# EAGLE board Frisk_PCB (EAGLE 9.7.0)
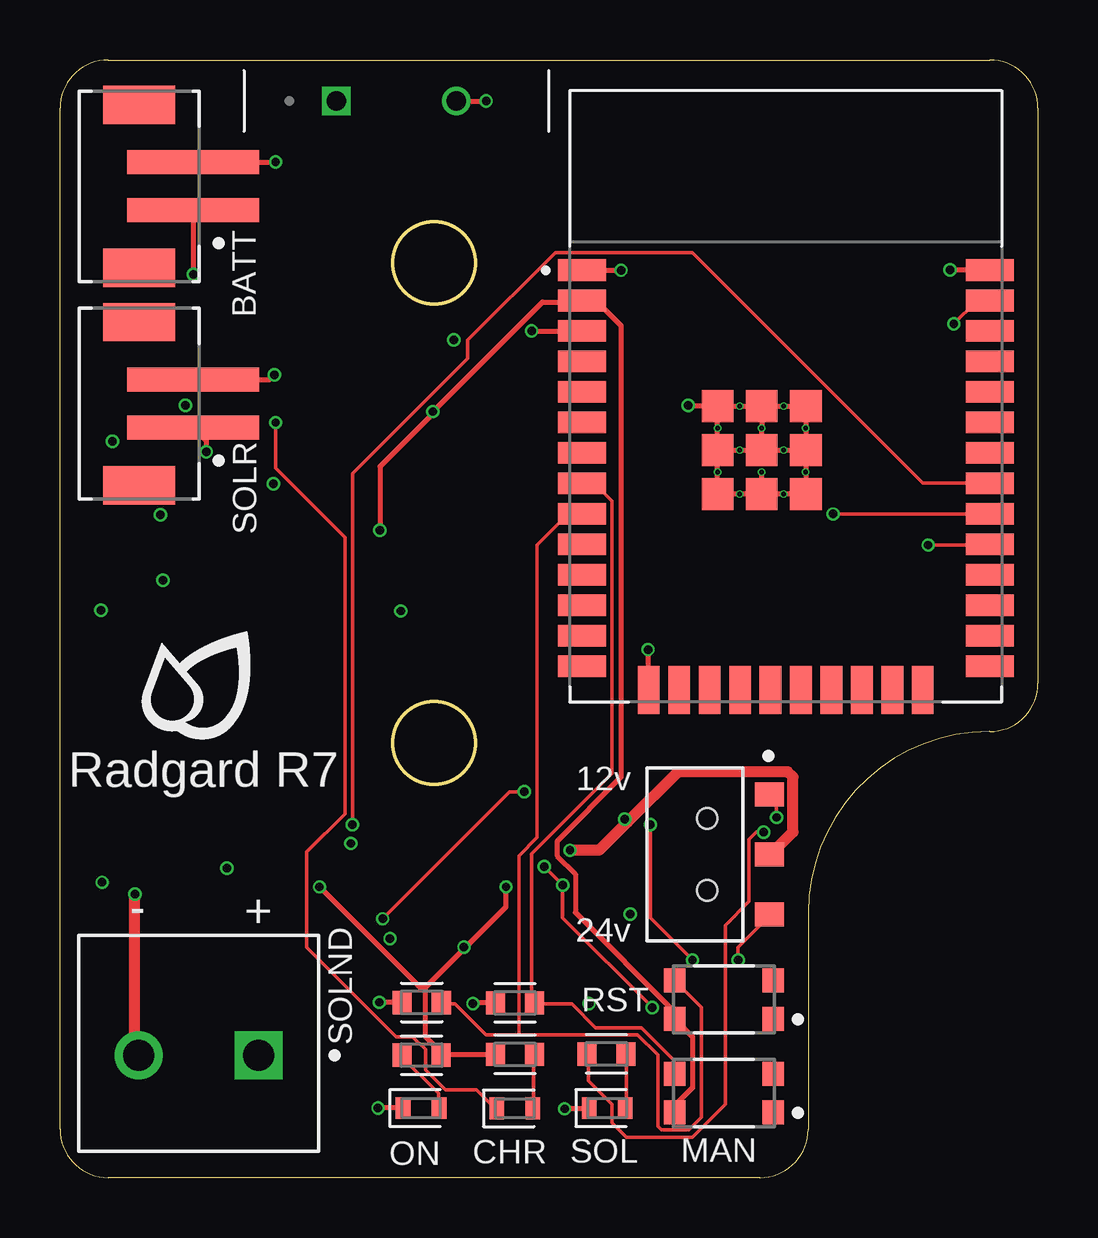
[diagram p0: board, top side]
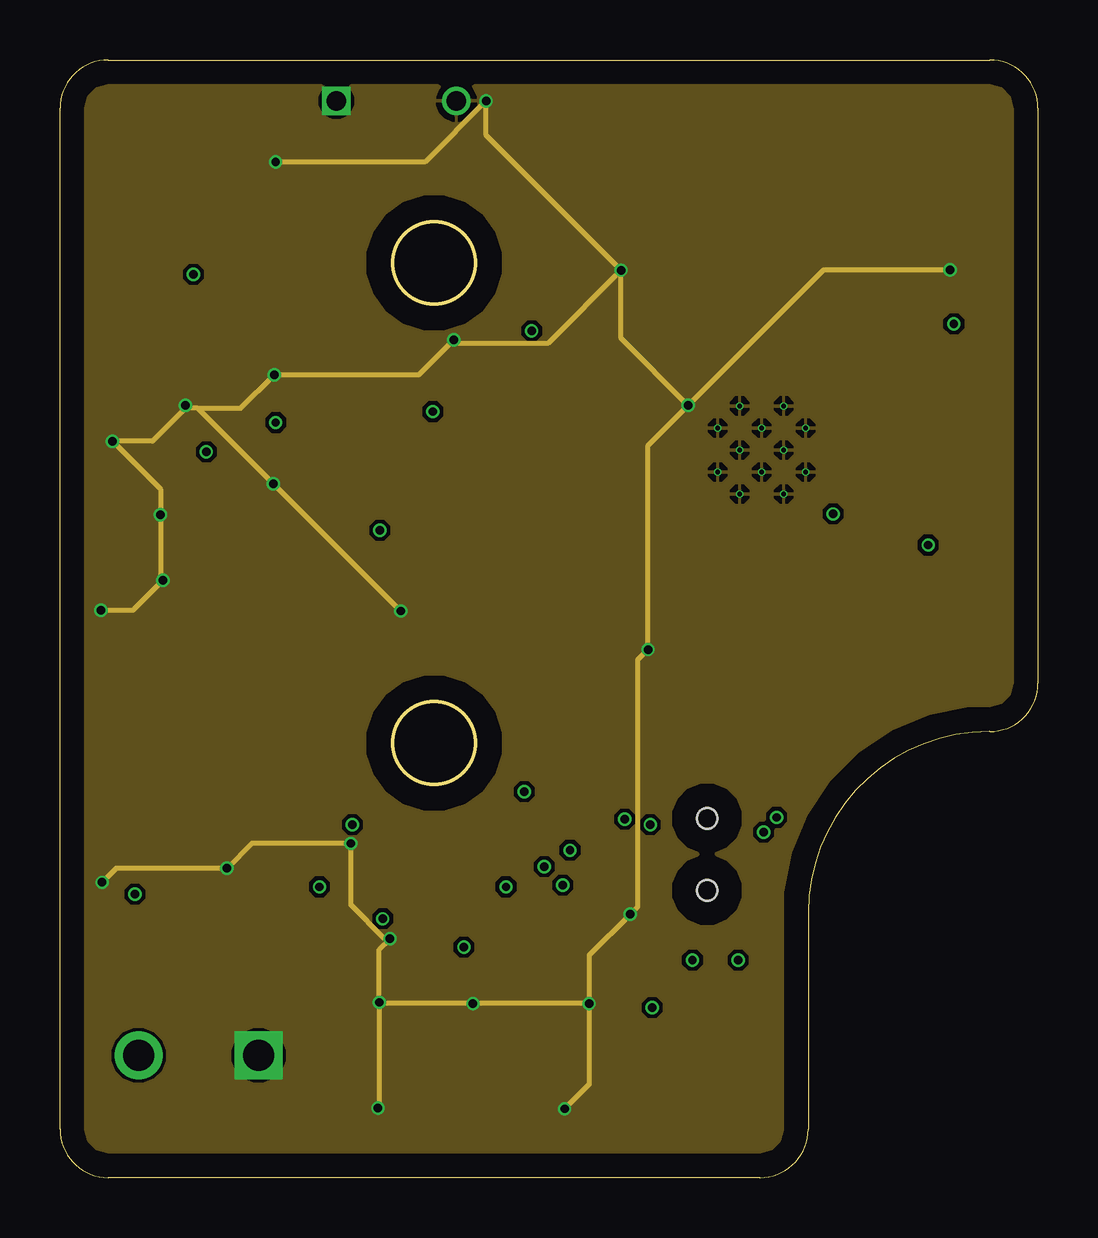
[diagram p1: board, inner layer Route2]
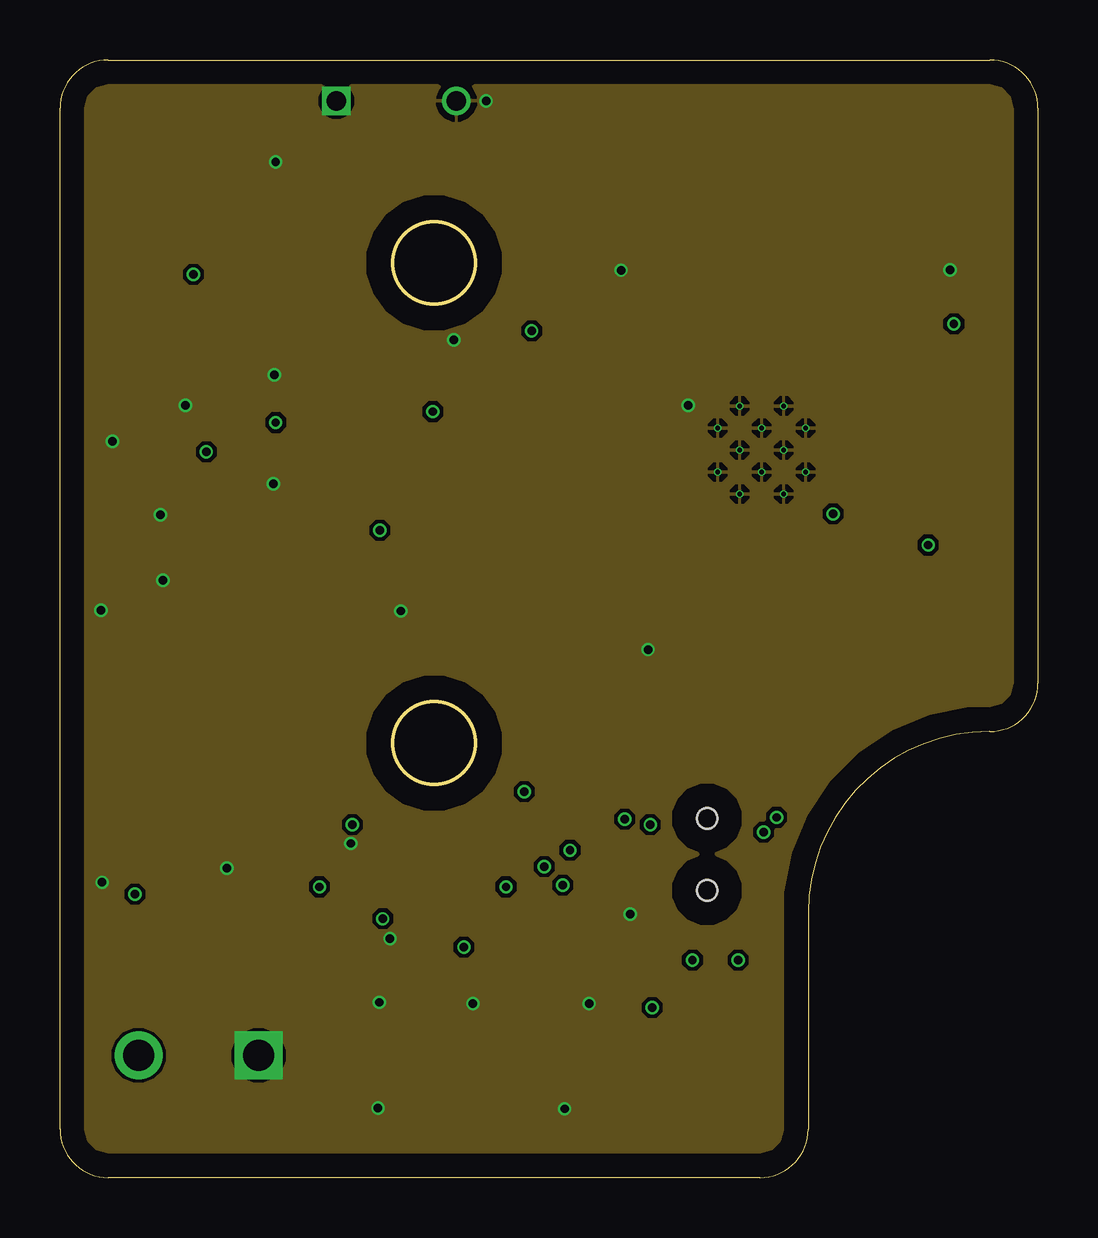
[diagram p2: board, inner layer Route15]
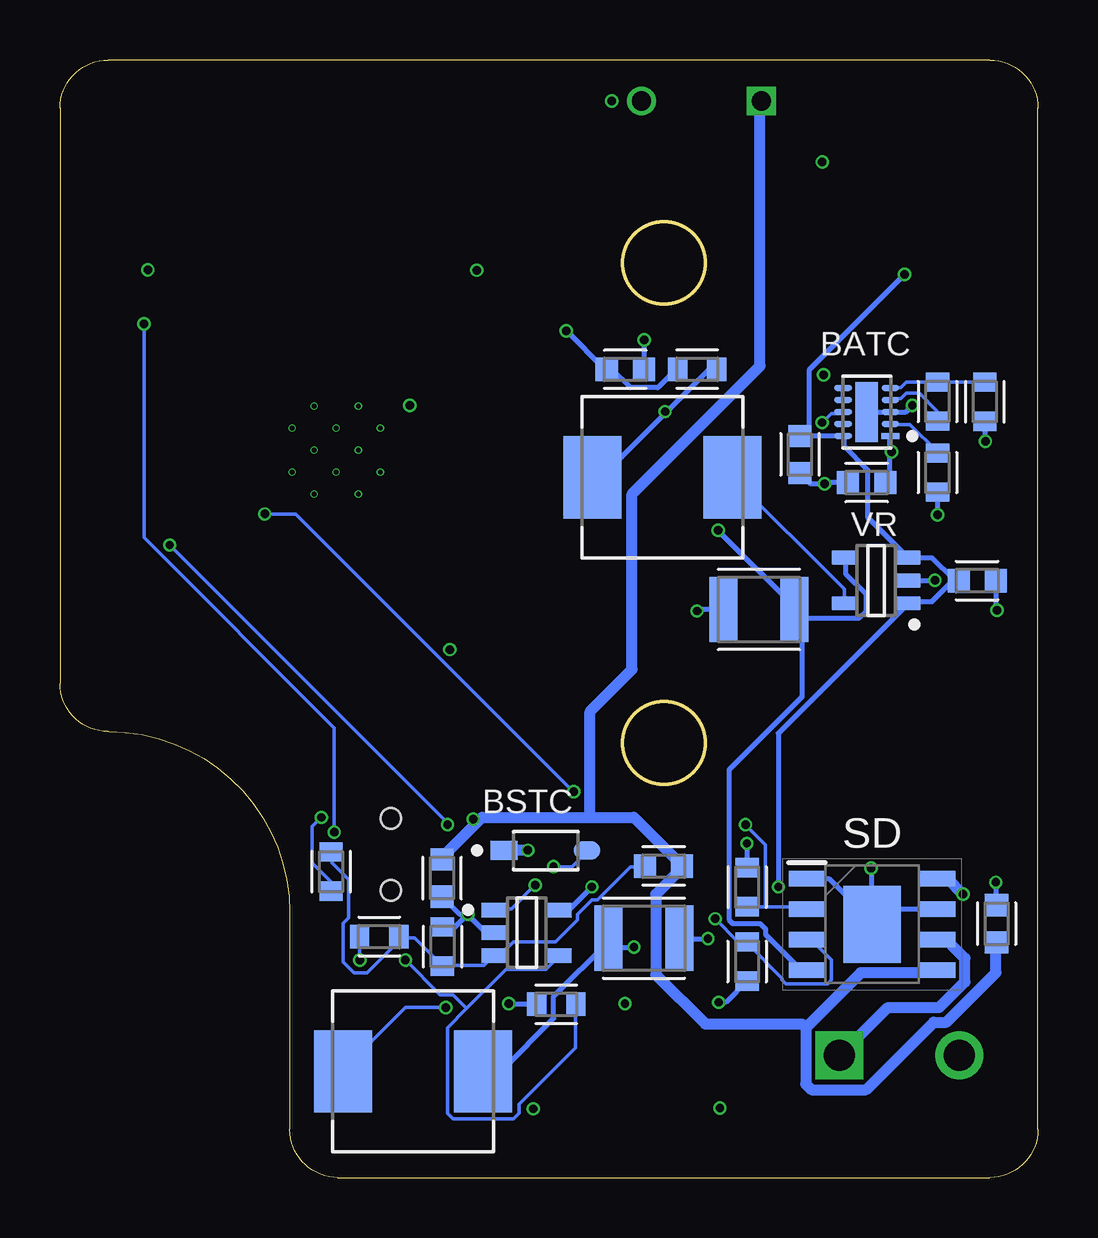
[diagram p3: board, bottom side, seen from below]

Size 40.77 x 46.58 mm. Coordinates in mm from the lower left corner, seen from the top.
Outline: 2.01,46.58 arc90 0,44.58 0,2.01 arc90 2.01,0 29.18,0 arc90 31.19,2.01 31.19,11.05 arc-90 38.73,18.59 38.76,18.59 arc90 40.77,20.6 40.77,44.58 arc90 38.76,46.58 2.01,46.58
Outline: circle at 15.6,38.13 radius 1.71
Outline: circle at 15.6,18.11 radius 1.71
Copper layers (1+2*15+16): Top 0.035mm / dielectric 1.5mm / Route2 0.035mm / dielectric 0.15mm / Route15 0.035mm / dielectric 0.2mm / Bottom 0.035mm
Design rules "default *": minimum track width 6mil, minimum drill 0.35mm, track to track 6mil, track to pad 6mil, pad to pad 6mil, via to via 6mil, smd to smd 6mil, copper to edge 40mil, drill to drill 6mil, minimum pad ring 0mil, minimum via ring 4mil, stop-mask expansion 4mil, vias tented up to drill 0mil, thermal gap 10mil
Net classes: 0 default: width 0.127 mm; 1 GND: width 0.203 mm; 2 V_LOW: width 0.203 mm; 5 V_HIGH: width 0.457 mm
tKeepout: 7 lines
tRestrict: 8 lines

## Footprints (pad centres in the part's own frame; a part is rotated, then mirrored left to right if it is on the bottom)
C&K_AYZ0102AGRLC_0 = smd 1 x 1.2: 1 -2.5,2.6; 2 0,2.6; 3 2.5,2.6 | hole 0.85: -1.5,0; 1.5,0
TEXAS_INSTRUMENTS_BQ24210DQCT_2 = smd 0.736 x 0.242: 1 -0.988,1; 2 -0.988,0.5; 3 -0.988,0; 4 -0.988,-0.5; 5 -0.988,-1; 6 0.988,-1; 7 0.988,-0.5; 8 0.988,0; 9 0.988,0.5; 10 0.988,1 | smd 0.94 x 2.5: 11 0,0
JST_B2B-PH-SM4-TB_LF_SN_0 = smd 1 x 5.5: 1 1,1; 2 -1,1 | smd 1.6 x 3: 3 3.4,-1.25; 4 -3.4,-1.25
TEXAS_INSTRUMENTS_LMR62421XMF-NOPB_0 = smd 1.05 x 0.6: 1 -1.35,0.95; 2 -1.35,0; 3 -1.35,-0.95; 4 1.35,-0.95; 5 1.35,0.95
CAPC1608X85 = smd 0.921 x 0.97: 1 -0.775,0; 2 0.775,0
CAPC3225X135 = smd 1.165 x 2.715: 1 -1.475,0; 2 1.475,0
CAPPRD500W60D1250H2700 = drill 0.8 pad 1.15: N 2.5,0 | drill 0.8 pad 1.15 square: P -2.5,0
LEDC1608X65N_RND-R = smd 0.612 x 0.912: A 0.75,0; C -0.75,0
ON_SEMI_MBR0530_2 = smd 1.108 x 0.782: 1 -1.73,0; 2 1.73,0
VISHAY_IHLP2525CZER100M01_0 = smd 2.413 x 3.429: 1 -2.921,0; 2 2.921,0
C&K_COMPONENTS_KMR231NG_LFS_0 = smd 0.9 x 1: 1 -2.05,0.8; 2 2.05,0.8; 3 -2.05,-0.8; 4 2.05,-0.8
MODULE_ESP32-WROOM-32E_(16MB) = smd 2 x 0.9: 1 -8.5,5.26; 2 -8.5,3.99; 3 -8.5,2.72; 4 -8.5,1.45; 5 -8.5,0.18; 6 -8.5,-1.09; 7 -8.5,-2.36; 8 -8.5,-3.63; 9 -8.5,-4.9; 10 -8.5,-6.17; 11 -8.5,-7.44; 12 -8.5,-8.71; 13 -8.5,-9.98; 14 -8.5,-11.25; 25 8.5,-11.25; 26 8.5,-9.98; 27 8.5,-8.71; 28 8.5,-7.44; 29 8.5,-6.17; 30 8.5,-4.9; 31 8.5,-3.63; 32 8.5,-2.36; 33 8.5,-1.09; 34 8.5,0.18; 35 8.5,1.45; 36 8.5,2.72; 37 8.5,3.99; 38 8.5,5.26 | smd 0.9 x 2: 15 -5.715,-12.25; 16 -4.445,-12.25; 17 -3.175,-12.25; 18 -1.905,-12.25; 19 -0.635,-12.25; 20 0.635,-12.25; 21 1.905,-12.25; 22 3.175,-12.25; 23 4.445,-12.25; 24 5.715,-12.25 | smd 1.33 x 1.33: 39_1 -2.835,-0.405; 39_2 -1,-0.405; 39_3 0.835,-0.405; 39_4 -2.835,-2.24; 39_5 -1,-2.24; 39_6 0.835,-2.24; 39_7 -2.835,-4.075; 39_8 -1,-4.075; 39_9 0.835,-4.075 | drill 0.2 pad 0.3: 39_10 -1.917,-0.405; 39_11 -0.083,-0.405; 39_12 -2.835,-1.323; 39_13 -1,-1.323; 39_14 0.835,-1.323; 39_15 -1.917,-2.24; 39_16 -0.083,-2.24; 39_17 -2.835,-3.158; 39_18 -1,-3.158; 39_19 0.835,-3.158; 39_20 -1.917,-4.075; 39_21 -0.083,-4.075
RESC1608X60 = smd 0.799 x 0.974: 1 -0.815,0; 2 0.815,0
SOIC127P600X170-9N = smd 1.525 x 0.65: 1 -2.712,1.905; 2 -2.712,0.635; 3 -2.712,-0.635; 4 -2.712,-1.905; 5 2.712,-1.905; 6 2.712,-0.635; 7 2.712,0.635; 8 2.712,1.905 | smd 2.39 x 3.2: 9 0,0
PHOENIX_CONTACT_1935161_0 = drill 1.3 pad 2 square: 1 -2.5,0.5 | drill 1.3 pad 2: 2 2.5,0.5
TEXAS_INSTRUMENTS_TPS62203DBVT_0 = smd 0.6 x 1.1: 1 -0.95,-1.3; 2 0,-1.3; 3 0.95,-1.3; 4 0.95,1.3; 5 -0.95,1.3

## Placement (x,y rotation side)
12V/24V_SWITCH  C&K_AYZ0102AGRLCC&K_AYZ0102AGRLC_0_0  [C&K_AYZ0102AGRLC_0]  26.98,13.47 270 top
BATC  TEXAS_INSTRUMENTS_BQ24210DQCTTEXAS_INSTRUMENTS_BQ24210DQCT_0_2  [TEXAS_INSTRUMENTS_BQ24210DQCT_2]  7.14,31.91 180 bottom
BATT  JST_B2B-PH-SM4-TB_LF_SNJST_B2B-PH-SM4-TB_LF_SN_0_0  [JST_B2B-PH-SM4-TB_LF_SN_0]  4.54,41.32 270 top
BSTC  TEXAS_INSTRUMENTS_LMR62421XMF-NOPBTEXAS_INSTRUMENTS_LMR62421XMF-NOPB_0_0  [TEXAS_INSTRUMENTS_LMR62421XMF-NOPB_0]  21.31,10.2 0 bottom
C1  4.7uF  [CAPC1608X85]  2.53,24.88 180 bottom
C2  22uF  [CAPC3225X135]  11.63,23.68 0 bottom
C3  22uF  [CAPC3225X135]  16.43,9.98 180 bottom
C4  4.7uF  [CAPC1608X85]  24.84,12.48 270 bottom
C5  470pF  [CAPC1608X85]  15.61,12.98 0 bottom
C6  4.7uF  [CAPC1608X85]  1.73,10.58 90 bottom
C7  4.7uF  [CAPC1608X85]  7.14,28.97 0 bottom
C8  4.7uF  [CAPC1608X85]  9.93,30.14 90 bottom
C9  1uF  [CAPC1608X85]  17.2,33.69 0 bottom
C13  UVZ1E222  [CAPPRD500W60D1250H2700]  14.02,44.87 0 top
CHR  LED_RED  [LEDC1608X65N_RND-R]  18.96,2.89 0 top
D2  ON_SEMI_MBR0530ON_SEMI_MBR0530_0_2  [ON_SEMI_MBR0530_2]  20.52,13.63 0 bottom
L1  VISHAY_IHLP2525CZER100M01VISHAY_IHLP2525CZER100M01_0_0  [VISHAY_IHLP2525CZER100M01_0]  26.05,4.43 180 bottom
L3  VISHAY_IHLP2525CZER100M01VISHAY_IHLP2525CZER100M01_0_0  [VISHAY_IHLP2525CZER100M01_0]  15.65,29.19 180 bottom
MAN  C&K_COMPONENTS_KMR231NG_LFSC&K_COMPONENTS_KMR231NG_LFS_0_0  [C&K_COMPONENTS_KMR231NG_LFS_0]  27.68,3.52 180 top
MCU  ESP32-WROOM-32E_(16MB)  [MODULE_ESP32-WROOM-32E_(16MB)]  30.25,32.56 0 top
ON  LED_GREEN  [LEDC1608X65N_RND-R]  15.05,2.9 0 top
R1  180k  [RESC1608X60]  27.46,10.04 180 bottom
R2  10k  [RESC1608X60]  24.82,9.63 90 bottom
R3  86.6k  [RESC1608X60]  29.46,12.75 270 bottom
R4  10k  [RESC1608X60]  14.2,33.69 0 bottom
R5  10k  [RESC1608X60]  20.08,7.22 180 bottom
R6  10k  [RESC1608X60]  12.12,12.11 90 bottom
R7  1.5k  [RESC1608X60]  15.07,5.1 180 top
R8  10k  [RESC1608X60]  15.08,7.3 180 top
R9  10k  [RESC1608X60]  18.97,7.28 180 top
R10  21.5k  [RESC1608X60]  4.19,32.34 90 bottom
R11  787  [RESC1608X60]  4.19,29.39 90 bottom
R12  10k  [RESC1608X60]  12.12,9.01 90 bottom
R15  1.5k  [RESC1608X60]  18.96,5.14 180 top
R17  1.5k  [RESC1608X60]  22.78,5.15 0 top
R_THERM  10k NTC THERM  [RESC1608X60]  2.21,32.34 270 bottom
RST  C&K_COMPONENTS_KMR231NG_LFSC&K_COMPONENTS_KMR231NG_LFS_0_0  [C&K_COMPONENTS_KMR231NG_LFS_0]  27.68,7.43 180 top
SD  TB67H451FNG  [SOIC127P600X170-9N]  6.91,10.55 0 bottom
SOL  LED_BLUE  [LEDC1608X65N_RND-R]  22.81,2.9 0 top
SOLND  PHOENIX_CONTACT_1935161PHOENIX_CONTACT_1935161_0_0  [PHOENIX_CONTACT_1935161_0]  5.78,5.59 180 top
SOLR  JST_B2B-PH-SM4-TB_LF_SNJST_B2B-PH-SM4-TB_LF_SN_0_0  [JST_B2B-PH-SM4-TB_LF_SN_0]  4.55,32.25 270 top
VR  TEXAS_INSTRUMENTS_TPS62203DBVTTEXAS_INSTRUMENTS_TPS62203DBVT_0_0  [TEXAS_INSTRUMENTS_TPS62203DBVT_0]  6.74,24.89 90 bottom

## Library data of the parts
12V/24V_SWITCH = C&K - AYZ0102AGRLC; AUTOMOTIVE: No; CENTROID_NOT_SPECIFIED: No; CONTACT_CURRENT_RATING: 100mA; CONTACT_RESISTANCE: 80mΩ; DATASHEET: https://www.ckswitches.com/media/1431/ayz.pdf; DEVICE_CLASS_L1: Electromechanical; DEVICE_CLASS_L2: Switches; DEVICE_CLASS_L3: Slide Switches; DIGIKEY_DESCRIPTION: SWITCH SLIDE SPDT 100MA 12V; DIGIKEY_PART_NUMBER: 401-2012-1-ND; ELECTROMECHANICAL_LIFE: 10000Cycles; FOOTPRINT_VARIANT_NAME_0: Recommended_Land_Pattern; HEIGHT: 1.5mm; LEAD_FREE: Yes; MF: C&K; MFG_PACKAGE_IDENT: 0; MFG_PACKAGE_IDENT_DATE: 0; MFG_PACKAGE_IDENT_REV: 0; MOUNT: Surface Mount; MOUSER_DESCRIPTION: Slide Switches SPDT SMT 1.2A SUBMIN; MOUSER_PART_NUMBER: 611-AYZ0102AGRLC; MPN: AYZ0102AGRLC; PACKAGE: SMT_7MM2_5MM3; PREFIX: SW; ROHS: Yes; TEMPERATURE_RANGE_HIGH: +60°C; TEMPERATURE_RANGE_LOW: -10°C; THROW_CONFIGURATION: SPDT; VERIFICATION_VERSION: 0.0.0.3; VOLTAGE_RATING_DC: 12V
BATC = Texas Instruments - BQ24210DQCT; AUTOMOTIVE: No; CENTROID_NOT_SPECIFIED: No; DATASHEET: https://www.ti.com/lit/ds/symlink/bq24210.pdf?ts=1599751812951&ref_url=https%253A%252F%252Fwww.ti.com%252Fstore%252Fti%252Fen%252Fp%252Fproduct%252F%253Fp%253DBQ24210DQCT%2526keyMatch%253DBQ24210DQCT%2526tisearch%253DSearch-EN-everything%2526usecase%253DOPN; DEVICE_CLASS_L1: Integrated Circuits (ICs); DEVICE_CLASS_L2: Power Management ICs; DEVICE_CLASS_L3: Battery Management; DIGIKEY_DESCRIPTION: IC BATT CHARGER LI-ION 10WSON; DIGIKEY_PART_NUMBER: 296-28738-1-ND; FOOTPRINT_PARAMETERS_1: {"fp_type":"DFN","params":{"N":{"nom":10,"long name":"Number of leads","min":null,"max":null,"short name":"N","type":"count"},"A":{"nom":750000,"long name":"Height","min":700000,"max":800000,"short name":"A","type":"measurement"},"A1":{"nom":25000,"long name":"Package clearance","min":0,"max":50000,"short name":"A1","type":"measurement"},"A2":{"nom":725000,"long name":"Package height","min":650000,"max":800000,"short name":"A2","type":"measurement"},"D":{"nom":3000000,"long name":"Package length","min":2900000,"max":3100000,"short name":"D","type":"measurement"},"E":{"nom":2000000,"long name":"Package width","min":1900000,"max":2100000,"short name":"E","type":"measurement"},"B":{"nom":250000,"long name":"Lead width","min":200000,"max":300000,"short name":"B","type":"measurement"},"C":{"nom":200000,"long name":"Lead thickness","min":null,"max":null,"short name":"C","type":"measurement"},"L":{"nom":300000,"long name":"Lead foot length","min":250000,"max":350000,"short name":"L","type":"measurement"},"e":{"nom":500000,"long name":"Lead pitch","min":null,"max":null,"short name":"e","type":"measurement"},"HT":{"default":"Yes","long name":"Thermal pad","type":"multichoiceparent","short name":"HT","children":["D2","E2","PC"]},"offset x":{"nom":0,"long name":"X Center offset","min":null,"max":null,"short name":"offset x","type":"measurement"},"offset y":{"nom":0,"long name":"Y Center offset","min":null,"max":null,"short name":"offset y","type":"measurement"},"LS":{"default":"Rounded rectangle","long name":"Land shape","type":"multichoice","short name":"LS"},"LS1":{"default":"Rectangle","long name":"Land shape (Pin 1)","type":"multichoice","short name":"LS1"},"solder toe":{"nom":400000,"long name":"Solder fillet (toe)","min":null,"max":null,"short name":"solder toe","type":"fixedmeasurement"},"solder heel":{"nom":0,"long name":"Solder fillet (heel)","min":null,"max":null,"short name":"solder heel","type":"fixedmeasurement"},"solder side":{"nom":-40000,"long name":"Solder fillet (side)","min":null,"max":null,"short name":"solder side","type":"fixedmeasurement"},"courtyard":{"nom":500000,"long name":"Courtyard","min":null,"max":null,"short name":"courtyard","type":"fixedmeasurement"},"SF":{"default":"A","long name":"Packing level","type":"multichoiceparent","short name":"SF","help":"http://support.upverter.com/customer/portal/articles/978783-what-is-a-footprint-packing-level","children":["solder toe","solder heel","solder side","courtyard"]},"D2":{"nom":2400000,"long name":"Thermal pad length","min":2300000,"max":2500000,"short name":"D2","type":"measurement"},"E2":{"nom":840000,"long name":"Thermal pad width","min":740000,"max":940000,"short name":"E2","type":"measurement"},"PC":{"long name":"Paste coverage (%)","type":"percentage","short name":"PC","value":40}}}; FOOTPRINT_PARAMETERS_2: {"fp_type":"DFN","params":{"N":{"nom":10,"long name":"Number of leads","min":null,"max":null,"short name":"N","type":"count"},"A":{"nom":750000,"long name":"Height","min":700000,"max":800000,"short name":"A","type":"measurement"},"A1":{"nom":25000,"long name":"Package clearance","min":0,"max":50000,"short name":"A1","type":"measurement"},"A2":{"nom":725000,"long name":"Package height","min":650000,"max":800000,"short name":"A2","type":"measurement"},"D":{"nom":3000000,"long name":"Package length","min":2900000,"max":3100000,"short name":"D","type":"measurement"},"E":{"nom":2000000,"long name":"Package width","min":1900000,"max":2100000,"short name":"E","type":"measurement"},"B":{"nom":250000,"long name":"Lead width","min":200000,"max":300000,"short name":"B","type":"measurement"},"C":{"nom":200000,"long name":"Lead thickness","min":null,"max":null,"short name":"C","type":"measurement"},"L":{"nom":300000,"long name":"Lead foot length","min":250000,"max":350000,"short name":"L","type":"measurement"},"e":{"nom":500000,"long name":"Lead pitch","min":null,"max":null,"short name":"e","type":"measurement"},"D2":{"nom":2400000,"long name":"Thermal pad length","min":2300000,"max":2500000,"short name":"D2","type":"measurement"},"E2":{"nom":840000,"long name":"Thermal pad width","min":740000,"max":940000,"short name":"E2","type":"measurement"},"PC":{"long name":"Paste coverage (%)","type":"percentage","short name":"PC","value":40},"HT":{"default":"Yes","long name":"Thermal pad","type":"multichoiceparent","short name":"HT","children":["D2","E2","PC"]},"offset x":{"nom":0,"long name":"X Center offset","min":null,"max":null,"short name":"offset x","type":"measurement"},"offset y":{"nom":0,"long name":"Y Center offset","min":null,"max":null,"short name":"offset y","type":"measurement"},"LS":{"default":"Rounded rectangle","long name":"Land shape","type":"multichoice","short name":"LS"},"LS1":{"default":"Rectangle","long name":"Land shape (Pin 1)","type":"multichoice","short name":"LS1"},"solder toe":{"nom":300000,"long name":"Solder fillet (toe)","min":null,"max":null,"short name":"solder toe","type":"fixedmeasurement"},"solder heel":{"nom":0,"long name":"Solder fillet (heel)","min":null,"max":null,"short name":"solder heel","type":"fixedmeasurement"},"solder side":{"nom":-40000,"long name":"Solder fillet (side)","min":null,"max":null,"short name":"solder side","type":"fixedmeasurement"},"courtyard":{"nom":250000,"long name":"Courtyard","min":null,"max":null,"short name":"courtyard","type":"fixedmeasurement"},"SF":{"default":"B","long name":"Packing level","type":"multichoiceparent","short name":"SF","help":"http://support.upverter.com/customer/portal/articles/978783-what-is-a-footprint-packing-level","children":["solder toe","solder heel","solder side","courtyard"]}}}; FOOTPRINT_PARAMETERS_3: {"fp_type":"DFN","params":{"N":{"nom":10,"long name":"Number of leads","min":null,"max":null,"short name":"N","type":"count"},"A":{"nom":750000,"long name":"Height","min":700000,"max":800000,"short name":"A","type":"measurement"},"A1":{"nom":25000,"long name":"Package clearance","min":0,"max":50000,"short name":"A1","type":"measurement"},"A2":{"nom":725000,"long name":"Package height","min":650000,"max":800000,"short name":"A2","type":"measurement"},"D":{"nom":3000000,"long name":"Package length","min":2900000,"max":3100000,"short name":"D","type":"measurement"},"E":{"nom":2000000,"long name":"Package width","min":1900000,"max":2100000,"short name":"E","type":"measurement"},"B":{"nom":250000,"long name":"Lead width","min":200000,"max":300000,"short name":"B","type":"measurement"},"C":{"nom":200000,"long name":"Lead thickness","min":null,"max":null,"short name":"C","type":"measurement"},"L":{"nom":300000,"long name":"Lead foot length","min":250000,"max":350000,"short name":"L","type":"measurement"},"e":{"nom":500000,"long name":"Lead pitch","min":null,"max":null,"short name":"e","type":"measurement"},"D2":{"nom":2400000,"long name":"Thermal pad length","min":2300000,"max":2500000,"short name":"D2","type":"measurement"},"E2":{"nom":840000,"long name":"Thermal pad width","min":740000,"max":940000,"short name":"E2","type":"measurement"},"PC":{"long name":"Paste coverage (%)","type":"percentage","short name":"PC","value":40},"HT":{"default":"Yes","long name":"Thermal pad","type":"multichoiceparent","short name":"HT","children":["D2","E2","PC"]},"offset x":{"nom":0,"long name":"X Center offset","min":null,"max":null,"short name":"offset x","type":"measurement"},"offset y":{"nom":0,"long name":"Y Center offset","min":null,"max":null,"short name":"offset y","type":"measurement"},"LS":{"default":"Rounded rectangle","long name":"Land shape","type":"multichoice","short name":"LS"},"LS1":{"default":"Rectangle","long name":"Land shape (Pin 1)","type":"multichoice","short name":"LS1"},"solder toe":{"nom":200000,"long name":"Solder fillet (toe)","min":null,"max":null,"short name":"solder toe","type":"fixedmeasurement"},"solder heel":{"nom":0,"long name":"Solder fillet (heel)","min":null,"max":null,"short name":"solder heel","type":"fixedmeasurement"},"solder side":{"nom":-40000,"long name":"Solder fillet (side)","min":null,"max":null,"short name":"solder side","type":"fixedmeasurement"},"courtyard":{"nom":100000,"long name":"Courtyard","min":null,"max":null,"short name":"courtyard","type":"fixedmeasurement"},"SF":{"default":"C","long name":"Packing level","type":"multichoiceparent","short name":"SF","help":"http://support.upverter.com/customer/portal/articles/978783-what-is-a-footprint-packing-level","children":["solder toe","solder heel","solder side","courtyard"]}}}; FOOTPRINT_VARIANT_NAME_0: Recommended_Land_Pattern; FOOTPRINT_VARIANT_NAME_1: IPC_A; FOOTPRINT_VARIANT_NAME_2: IPC_B; FOOTPRINT_VARIANT_NAME_3: IPC_C; HEIGHT: 0.8mm; IMPORTED_FROM: vault; IMPORT_TS: 1521175915; LEAD_FREE: Yes; MAX_JUNCTION_TEMP: +125°C; MAX_SUPPLY_VOLTAGE: 18V; MF: Texas Instruments; MFG_PACKAGE_IDENT: DQC0010A; MFG_PACKAGE_IDENT_COMPONENT_ID: 5c282db217c73b58; MFG_PACKAGE_IDENT_DATE: 0; MFG_PACKAGE_IDENT_REV: 0; MIN_SUPPLY_VOLTAGE: 3.5V; MOUSER_DESCRIPTION: 800mA, single-input, single cell Li-ion Solar battery charger 10-WSON -40 to 85; MOUSER_PART_NUMBER: 595-BQ24210DQCT; MPN: BQ24210DQCT; NOMINAL_SUPPLY_CURRENT: 0.8mA; NUMBER_OF_CELLS: 1; OUTPUT_CURRENT: 800mA; PACKAGE: WSON10; PREFIX: U; ROHS: Yes; STANDOFF_HEIGHT: 0mm; TEMPERATURE_RANGE_HIGH: +85°C; TEMPERATURE_RANGE_LOW: -40°C; VAULT_GUID: 3C1E92C9-7C0E-4F0B-8E5B-B3C5C5314291; VERIFICATION_VERSION: 0.0.0.3
BATT SOLR = JST - B2B-PH-SM4-TB(LF)(SN); CENTROID_NOT_SPECIFIED: No; COLOR: White; CONTACT_MATERIAL: Brass; CONTACT_PLATING: Tin; CURRENT_RATING: 2 A; DATASHEET: https://upverter.com/datasheet/05f4473ffc638d76a3bb68900fd4324175be47ba.pdf; DIGIKEY_DESCRIPTION: CONN 2 Positions Header, Shrouded Connector 0.079" (2.00mm) Surface Mount Tin; DIGIKEY_PART_NUMBER: 455-1734-1-ND; FLAMMABILITY_RATING: UL 94 V-0; GENDER: Female; HOUSING_COLOR: Natural; HOUSING_MATERIAL: Nylon; IMPORTED_FROM: octopart; INSULATION_RESISTANCE: 1 GΩ; LEAD_FREE: yes; MF: JST; MOUNTING_TYPE: surface mount; MPN: B2B-PH-SM4-TB(LF)(SN); NUMBER_OF_CONTACTS: 2; NUMBER_OF_POSITIONS: 2; NUMBER_OF_ROWS: 1; NUM_PINS: 2; PACKAGE: CONN_SMT_7MM95_5MM0; PIN_PITCH: 2 mm; PREFIX: J; ROHS: yes; SIZE_HEIGHT: 6.6 mm; SIZE_LENGTH: 7.95 mm; SIZE_WIDTH: 5 mm; TEMPERATURE_RANGE_HIGH: +85˚C; TEMPERATURE_RANGE_LOW: -25˚C; VOLTAGE_RATING_AC: 100 V
BSTC = LMR62421; CENTROID_NOT_SPECIFIED: No; DATASHEET: http://www.ti.com/lit/ds/symlink/lmr62421.pdf; DIGIKEY_DESCRIPTION: IC REG BST SEPIC ADJ 2.1A SOT23; DIGIKEY_PART_NUMBER: 296-39047-1-ND; LEAD_FREE: yes; MF: Texas Instruments; MFG_PACKAGE_IDENT: DBV(R-PDSO-G5); MOUSER_PART_NUMBER: 926-LMR62421XMF/NOPB; MPN: LMR62421XMF/NOPB; PACKAGE: SOT-23-5; PREFIX: U; ROHS: yes; TEMPERATURE_RANGE_HIGH: +125°C; TEMPERATURE_RANGE_LOW: -40°C
C1-C9 = Capacitor; CATEGORY: Capacitor
C13 = CAPPRD500W60D1250H2700
CHR ON SOL = LED; CATEGORY: LED; COLOR: RED; DESCRIPTION: CHIP LED ROUND; SUB-CATEGORY: CHIP; TYPE: ROUND_TOP
D2 = MBR0530; AUTOMOTIVE: No; CENTROID_NOT_SPECIFIED: No; DATASHEET: http://www.onsemi.com/pub/Collateral/MBR0530T1-D.PDF; DC_BLOCKING_VOLTAGE: 30V; DEVICE_CLASS_L1: Discrete Semiconductors; DEVICE_CLASS_L2: Diodes; DEVICE_CLASS_L3: Schottky Diodes; DIGIKEY_DESCRIPTION: DIODE SCHOTTKY 30V 500MA SOD123; DIGIKEY_PART_NUMBER: MBR0530CT-ND; FOOTPRINT_PARAMETERS_1: {"fp_type":"SOD123","params":{"N":{"long name":"Number of leads","type":"fixed","short name":"N","value":2},"A":{"nom":1170000,"long name":"Height","min":940000,"max":1350000,"short name":"A","type":"measurement"},"A1":{"nom":50000,"long name":"Package clearance","min":0,"max":100000,"short name":"A1","type":"measurement"},"A2":{"nom":1120000,"long name":"Package height","min":840000,"max":1350000,"short name":"A2","type":"measurement"},"D":{"nom":3680000,"long name":"Length /w leads","min":3560000,"max":3860000,"short name":"D","type":"measurement"},"D1":{"nom":2690000,"long name":"Package length","min":2540000,"max":2840000,"short name":"D1","type":"measurement"},"E":{"nom":1600000,"long name":"Package width","min":1400000,"max":1800000,"short name":"E","type":"measurement"},"B":{"nom":610000,"long name":"Lead width","min":510000,"max":710000,"short name":"B","type":"measurement"},"C":{"nom":false,"long name":"Lead thickness","min":false,"max":150000,"short name":"C","type":"measurement"},"L":{"nom":false,"long name":"Lead foot length","min":250000,"max":false,"short name":"L","type":"measurement"},"PHI":{"nom":false,"long name":"Lead angle","min":0,"max":10000000,"short name":"PHI","type":"measurement"},"offset x":{"nom":0,"long name":"X Center offset","min":null,"max":null,"short name":"offset x","type":"measurement"},"offset y":{"nom":0,"long name":"Y Center offset","min":null,"max":null,"short name":"offset y","type":"measurement"},"LS":{"default":"Rounded rectangle","long name":"Land shape","type":"multichoice","short name":"LS"},"LS1":{"default":"Rectangle","long name":"Land shape (Pin 1)","type":"multichoice","short name":"LS1"},"solder toe":{"nom":550000,"long name":"Solder fillet (toe)","min":null,"max":null,"short name":"solder toe","type":"fixedmeasurement"},"solder heel":{"nom":450000,"long name":"Solder fillet (heel)","min":null,"max":null,"short name":"solder heel","type":"fixedmeasurement"},"solder side":{"nom":50000,"long name":"Solder fillet (side)","min":null,"max":null,"short name":"solder side","type":"fixedmeasurement"},"courtyard":{"nom":500000,"long name":"Courtyard","min":null,"max":null,"short name":"courtyard","type":"fixedmeasurement"},"SF":{"default":"A","long name":"Packing level","type":"multichoiceparent","short name":"SF","help":"http://support.upverter.com/customer/portal/articles/978783-what-is-a-footprint-packing-level","children":["solder toe","solder heel","solder side","courtyard"]}}}; FOOTPRINT_PARAMETERS_2: {"fp_type":"SOD123","params":{"N":{"long name":"Number of leads","type":"fixed","short name":"N","value":2},"A":{"nom":1170000,"long name":"Height","min":940000,"max":1350000,"short name":"A","type":"measurement"},"A1":{"nom":50000,"long name":"Package clearance","min":0,"max":100000,"short name":"A1","type":"measurement"},"A2":{"nom":1120000,"long name":"Package height","min":840000,"max":1350000,"short name":"A2","type":"measurement"},"D":{"nom":3680000,"long name":"Length /w leads","min":3560000,"max":3860000,"short name":"D","type":"measurement"},"D1":{"nom":2690000,"long name":"Package length","min":2540000,"max":2840000,"short name":"D1","type":"measurement"},"E":{"nom":1600000,"long name":"Package width","min":1400000,"max":1800000,"short name":"E","type":"measurement"},"B":{"nom":610000,"long name":"Lead width","min":510000,"max":710000,"short name":"B","type":"measurement"},"C":{"nom":false,"long name":"Lead thickness","min":false,"max":150000,"short name":"C","type":"measurement"},"L":{"nom":false,"long name":"Lead foot length","min":250000,"max":false,"short name":"L","type":"measurement"},"PHI":{"nom":false,"long name":"Lead angle","min":0,"max":10000000,"short name":"PHI","type":"measurement"},"offset x":{"nom":0,"long name":"X Center offset","min":null,"max":null,"short name":"offset x","type":"measurement"},"offset y":{"nom":0,"long name":"Y Center offset","min":null,"max":null,"short name":"offset y","type":"measurement"},"LS":{"default":"Rounded rectangle","long name":"Land shape","type":"multichoice","short name":"LS"},"LS1":{"default":"Rectangle","long name":"Land shape (Pin 1)","type":"multichoice","short name":"LS1"},"solder toe":{"nom":350000,"long name":"Solder fillet (toe)","min":null,"max":null,"short name":"solder toe","type":"fixedmeasurement"},"solder heel":{"nom":350000,"long name":"Solder fillet (heel)","min":null,"max":null,"short name":"solder heel","type":"fixedmeasurement"},"solder side":{"nom":30000,"long name":"Solder fillet (side)","min":null,"max":null,"short name":"solder side","type":"fixedmeasurement"},"courtyard":{"nom":250000,"long name":"Courtyard","min":null,"max":null,"short name":"courtyard","type":"fixedmeasurement"},"SF":{"default":"B","long name":"Packing level","type":"multichoiceparent","short name":"SF","help":"http://support.upverter.com/customer/portal/articles/978783-what-is-a-footprint-packing-level","children":["solder toe","solder heel","solder side","courtyard"]}}}; FOOTPRINT_PARAMETERS_3: {"fp_type":"SOD123","params":{"N":{"long name":"Number of leads","type":"fixed","short name":"N","value":2},"A":{"nom":1170000,"long name":"Height","min":940000,"max":1350000,"short name":"A","type":"measurement"},"A1":{"nom":50000,"long name":"Package clearance","min":0,"max":100000,"short name":"A1","type":"measurement"},"A2":{"nom":1120000,"long name":"Package height","min":840000,"max":1350000,"short name":"A2","type":"measurement"},"D":{"nom":3680000,"long name":"Length /w leads","min":3560000,"max":3860000,"short name":"D","type":"measurement"},"D1":{"nom":2690000,"long name":"Package length","min":2540000,"max":2840000,"short name":"D1","type":"measurement"},"E":{"nom":1600000,"long name":"Package width","min":1400000,"max":1800000,"short name":"E","type":"measurement"},"B":{"nom":610000,"long name":"Lead width","min":510000,"max":710000,"short name":"B","type":"measurement"},"C":{"nom":false,"long name":"Lead thickness","min":false,"max":150000,"short name":"C","type":"measurement"},"L":{"nom":false,"long name":"Lead foot length","min":250000,"max":false,"short name":"L","type":"measurement"},"PHI":{"nom":false,"long name":"Lead angle","min":0,"max":10000000,"short name":"PHI","type":"measurement"},"offset x":{"nom":0,"long name":"X Center offset","min":null,"max":null,"short name":"offset x","type":"measurement"},"offset y":{"nom":0,"long name":"Y Center offset","min":null,"max":null,"short name":"offset y","type":"measurement"},"LS":{"default":"Rounded rectangle","long name":"Land shape","type":"multichoice","short name":"LS"},"LS1":{"default":"Rectangle","long name":"Land shape (Pin 1)","type":"multichoice","short name":"LS1"},"solder toe":{"nom":150000,"long name":"Solder fillet (toe)","min":null,"max":null,"short name":"solder toe","type":"fixedmeasurement"},"solder heel":{"nom":250000,"long name":"Solder fillet (heel)","min":null,"max":null,"short name":"solder heel","type":"fixedmeasurement"},"solder side":{"nom":10000,"long name":"Solder fillet (side)","min":null,"max":null,"short name":"solder side","type":"fixedmeasurement"},"courtyard":{"nom":100000,"long name":"Courtyard","min":null,"max":null,"short name":"courtyard","type":"fixedmeasurement"},"SF":{"default":"C","long name":"Packing level","type":"multichoiceparent","short name":"SF","help":"http://support.upverter.com/customer/portal/articles/978783-what-is-a-footprint-packing-level","children":["solder toe","solder heel","solder side","courtyard"]}}}; FOOTPRINT_URL: http://www.onsemi.com/pub/Collateral/425-04.PDF; FOOTPRINT_VARIANT_NAME_0: Recommended_Land_Pattern; FOOTPRINT_VARIANT_NAME_1: IPC_A; FOOTPRINT_VARIANT_NAME_2: IPC_B; FOOTPRINT_VARIANT_NAME_3: IPC_C; FORWARD_CURRENT: 500mA; HEIGHT: 1.35mm; IPC_LAND_PATTERN_NAME: SOD368160X117-2; LEAD_FREE: Yes; MAX_JUNCTION_TEMP: +125°C; MAX_REPETITIVE_REVERSE_VOLTAGE: 30V; MAX_SURGE_FORWARD_CURRENT: 5.5A; MF: ON Semi; MFG_PACKAGE_IDENT: 425-04; MFG_PACKAGE_IDENT_COMPONENT_ID: a4c7e1e246482822; MFG_PACKAGE_IDENT_DATE: 10/2009; MFG_PACKAGE_IDENT_REV: G; MOUSER_PART_NUMBER: 512-MBR0530; MPN: MBR0530; PACKAGE: SOD-123; PEAK_REVERSE_CURRENT: 130uA; PREFIX: D; ROHS: Yes; STANDOFF_HEIGHT: 0mm; TEMPERATURE_RANGE_HIGH: +125°C; TEMPERATURE_RANGE_LOW: -65°C; VERIFICATION_VERSION: 0.0.0.3
L1 L3 = Vishay - IHLP2525CZER100M01; AUTOMOTIVE: No; CENTROID_NOT_SPECIFIED: No; COMPOSITION: Wirewound; CORE_MATERIAL: SMC; DATASHEET: http://www.vishay.com/doc?34104; DEVICE_CLASS_L1: Passive Components; DEVICE_CLASS_L2: Inductors; DEVICE_CLASS_L3: Fixed Inductors; FOOTPRINT_VARIANT_NAME_0: Recommended_Land_Pattern; HEIGHT: 3mm; INDUCTANCE: 10uH; LEAD_FREE: Yes; MF: Vishay; MFG_PACKAGE_IDENT: IHLP-2525CZ-FP_2.413x3.429-3D_3.0; MFG_PACKAGE_IDENT_COMPONENT_ID: 3ae1c095ea610fd9; MFG_PACKAGE_IDENT_DATE: 0; MFG_PACKAGE_IDENT_REV: 0; MPN: IHLP2525CZER100M01; PACKAGE: SMT_INDUCTOR_6MM47_6MM47; PREFIX: L; RMS_CURRENT: 3A; ROHS: Yes; SATURATION_CURRENT: 7A; SELF_RESONANT_FREQUENCY: 16MHz; SERIES_RESISTANCE: 105mΩ; SHIELDING: true; TEMPERATURE_RANGE_HIGH: +125°C; TEMPERATURE_RANGE_LOW: -55°C; TEST_FREQUENCY: 100kHz; TOLERANCE: 20%; VERIFICATION_VERSION: 0.0.0.3
MAN RST = C&K Components - KMR231NG LFS; AUTOMOTIVE: No; CENTROID_NOT_SPECIFIED: No; CONTACT_CURRENT_RATING: 50mA; CONTACT_RESISTANCE: 100mΩ; DATASHEET: https://www.ckswitches.com/media/1479/kmr2.pdf; DEVICE_CLASS_L1: Electromechanical; DEVICE_CLASS_L2: Switches; DEVICE_CLASS_L3: Tactile Switches; DIGIKEY_DESCRIPTION: SWITCH TACTILE SPST-NO 0.05A 32V; DIGIKEY_PART_NUMBER: CKN10246CT-ND; ELECTROMECHANICAL_LIFE: 150000Cycles; FOOTPRINT_VARIANT_NAME_0: Recommended_Land_Pattern; HEIGHT: 1.9mm; LEAD_FREE: Yes; MF: C&K Components; MFG_PACKAGE_IDENT: 0; MFG_PACKAGE_IDENT_DATE: 0; MFG_PACKAGE_IDENT_REV: 0; MOUNT: Surface Mount; MOUSER_DESCRIPTION: Tactile Switches Tact; MOUSER_PART_NUMBER: 611-KMR231NGLFS; MPN: KMR231NG LFS; OPERATING_FORCE: 3N; PACKAGE: SMD4; PREFIX: SW; ROHS: Yes; TEMPERATURE_RANGE_HIGH: +85°C; TEMPERATURE_RANGE_LOW: -40°C; THROW_CONFIGURATION: SPST-NO; VERIFICATION_VERSION: 0.0.0.3; VOLTAGE_RATING_DC: 32V
MCU = ESP32-WROOM-32E__16MB_; MANUFACTURER: Espressif Systems; MAXIMUM_PACKAGE_HEIGHT: 3.25mm; PARTREV: 1.1; STANDARD: Manufacturer Recommendations
R1-R12 R15 R17 R_THERM = Resistor; CATEGORY: Resistor; SUB-CATEGORY: Fixed
SD = TB67H451FNG; DESCRIPTION: TOSHIBA BiCD Process Integrated Circuit Silicon Monolithic; HEIGHT: 1.7mm; MANUFACTURER_NAME: Toshiba; MANUFACTURER_PART_NUMBER: TB67H451FNG
SOLND = Phoenix Contact - 1935161; CENTROID_NOT_SPECIFIED: No; DATASHEET: https://media.digikey.com/pdf/Data%20Sheets/Phoenix%20Contact%20PDFs/1935161.pdf; DIGIKEY_DESCRIPTION: CONN TERM BLOCK PCB 2POS 5.0MM GREEN; DIGIKEY_PART_NUMBER: 277-1667-ND; IS_FEMALE: yes; LEAD_FREE: yes; MF: Phoenix Contact; MOUSER_PART_NUMBER: 651-1935161; MPN: 1935161; PACKAGE: TH_TERM_BLOCK_9MM0_10MM0; PREFIX: J; ROHS: yes
VR = Texas Instruments - TPS62203DBVT; CENTROID_NOT_SPECIFIED: No; DATASHEET: http://www.ti.com/lit/ds/symlink/tps62200.pdf; DIGIKEY_DESCRIPTION: IC REG BUCK 3.3V 0.3A SYNC SOT23; DIGIKEY_PART_NUMBER: 296-12719-1-ND; LEAD_FREE: yes; MF: Texas Instruments; MFG_PACKAGE_IDENT: DBV0005A; MOUSER_PART_NUMBER: 595-TPS62203DBVT; MPN: TPS62203DBVT; PACKAGE: SOT-23-5; PREFIX: U; ROHS: yes; TEMPERATURE_RANGE_HIGH: +85°C; TEMPERATURE_RANGE_LOW: -40°C

## Nets
BSTC: BSTC.4 MCU.29 R5.1
CHG: BATC.8 CHR.C
EN [V_LOW]: C9.1 MCU.3 R4.1
GND [GND]: BATC.3 BATC.11 BATT.2 BSTC.2 C1.1 C2.1 C3.1 C4.2 C6.2 C7.1 C8.1 C9.2 C13.N MCU.1 MCU.15 MCU.38 MCU.39_1 MCU.39_2 MCU.39_3 MCU.39_4 MCU.39_5 MCU.39_6 MCU.39_7 MCU.39_8 MCU.39_9 MCU.39_10 MCU.39_11 MCU.39_12 MCU.39_13 MCU.39_14 MCU.39_15 MCU.39_16 MCU.39_17 MCU.39_18 MCU.39_19 MCU.39_20 MCU.39_21 ON.C R2.2 R5.2 R6.2 R8.2 R9.2 R11.1 R12.1 R_THERM.2 SD.1 SD.7 SD.9 SOL.C SOLR.2 VR.2
MAN: MAN.4 MCU.8 R9.1
N$1: CHR.A R15.1
N$2: L3.1 VR.5
N$3: ON.A R7.2
N$4: BATC.5 R10.2 R_THERM.1
N$5: BSTC.1 D2.2 L1.2
N$7: BSTC.3 C5.1 R1.1 R2.1 R3.1
N$8: 12V/24V_SWITCH.3 R1.2
N$9: 12V/24V_SWITCH.1 R3.2
N$10: BATC.4 R10.1
N$11: BATC.2 R11.2
N$18: R17.2 SOL.A
PG: BATC.6 BATC.7
RST: MCU.9 R8.1 RST.4
S+ [V_HIGH]: SD.6 SOLND.1
S- [V_HIGH]: SD.8 SOLND.2
S_OPEN: MCU.37 R17.1
SD_IN1: MCU.30 R12.2 SD.3
SD_IN2: MCU.31 R6.1 SD.2
V_3.3 [V_LOW]: C2.2 L3.2 MAN.2 MCU.2 R4.2 RST.2 SD.4 VR.4
V_BATT [V_LOW]: BATC.10 BATT.1 BSTC.5 C1.2 C3.2 C8.2 L1.1 R7.1 R15.2 VR.1 VR.3
V_BOOST [V_HIGH]: 12V/24V_SWITCH.2 C4.1 C5.2 C6.1 C13.P D2.1 SD.5
V_SOLR [V_LOW]: BATC.1 C7.2 SOLR.1
VDPM: BATC.9

## Tracks (layer width: path | path; a pad name or v marks a point on that pad's centre or on a via)
BSTC  (via drill 0.35)
  Top 0.152: v36.2,26.36 38.71,26.36 MCU.29 | v26.36,9.07 24.61,10.82 v24.61,14.71
  Bottom 0.152: 23.81,7.05 22.17,8.69 20.5,8.69 19.96,9.22 BSTC.4 | 23.81,7.05 24.61,6.25 24.61,2.67 24.38,2.44 21.87,2.44 21.64,2.67 21.64,3.05 19.28,5.41 19.28,7.16 R5.1 | v26.36,9.07 24.92,7.62 24.38,7.62 23.81,7.05 | v24.61,14.71 24.61,14.78 v36.2,26.36
CHG  (via drill 0.35)
  Top 0.152: v8.99,31.47 8.99,29.57 11.89,26.67 11.89,15.16 10.29,13.56 10.29,9.6 14.02,5.87 14.71,5.87 15.24,5.33 15.24,4.5 16.08,3.66 17.37,3.66 18.14,2.9 CHR.C
  Bottom 0.152: v8.99,31.47 8.61,31.85 8.15,31.85 BATC.8
EN  (via drill 0.35)
  Top 0.203: v19.66,35.3 19.67,35.28 MCU.3
  Bottom 0.203: R4.1 15.09,33.68 15.85,32.92 16.99,32.92 17.75,33.68 17.91,33.68 C9.1 18.05,33.69 v19.66,35.3
GND  (via drill 0.35)
  Top 0.203: 27.49,32.16 MCU.39_1 27.39,32.19 v26.19,32.19 | 27.49,32.16 MCU.39_10 MCU.39_2 | MCU.39_2 MCU.39_11 MCU.39_3 MCU.39_14 MCU.39_6 | MCU.39_6 MCU.39_19 MCU.39_9 MCU.39_21 MCU.39_8 | MCU.39_8 MCU.39_20 MCU.39_7 MCU.39_17 MCU.39_4 | MCU.39_4 MCU.39_12 27.42,32.09 27.49,32.16 | MCU.39_8 MCU.39_18 | MCU.39_5 MCU.39_13 MCU.39_2 | MCU.39_4 MCU.39_15 MCU.39_5 | MCU.39_5 MCU.39_16 31.08,30.32 MCU.39_6 | MCU.1 v23.38,37.82 v23.39,37.82 | MCU.38 v37.12,37.82 v37.11,37.83 | MCU.15 24.54,21.99 v24.51,22.01 | R8.2 v13.31,7.3 | R9.2 17.24,7.28 v17.22,7.25 | ON.C v13.26,2.9 v13.26,2.89 | SOL.C 22.03,2.86 v21.04,2.86 | BATT.2 8.98,42.32 v8.99,42.33 | C13.N v17.76,44.87 v17.76,44.88 | SOLR.2 8.73,33.26 v8.93,33.46
  Route2 0.203: v26.19,32.19 23.39,34.98 v23.39,37.82 | v37.11,37.83 31.83,37.83 v26.19,32.19 | v8.99,42.33 15.22,42.33 v17.76,44.88 17.76,43.44 v23.39,37.82 | v23.39,37.82 20.34,34.77 16.57,34.77 v16.42,34.92 14.96,33.46 v8.93,33.46 7.54,32.07 5.75,32.07 | 5.23,32.07 3.86,30.69 v2.19,30.69 4.19,28.7 v4.19,27.62 4.19,25 v4.29,24.9 3.04,23.64 v1.7,23.64 | v1.76,12.31 2.34,12.89 v6.96,12.89 8,13.93 v12.13,13.93 12.13,11.36 13.53,9.96 v13.76,9.96 13.31,9.51 v13.31,7.3 | v14.21,23.62 14.2,23.62 v8.89,28.92 5.75,32.07 | v26.19,32.19 24.51,30.52 v24.51,22.01 24.08,21.57 24.08,11.29 v23.77,10.98 22.06,9.26 v22.06,7.25 | v22.06,7.25 22.06,3.88 v21.04,2.86 | v13.31,7.3 13.36,7.25 v17.22,7.25 v22.06,7.25 | v13.31,7.3 13.31,2.94 v13.26,2.89 | 5.75,32.07 5.23,32.07 | 5.23,32.07 v5.23,32.18
  Bottom 0.203: v16.42,34.92 v16.43,34.91 C9.2 | C8.1 9.48,28.92 v8.89,28.92 8.84,28.97 C7.1 | BATC.11 BATC.3 5.51,31.91 v5.23,32.18 | R11.1 v4.19,27.63 v4.19,27.62 | R_THERM.2 2.21,30.71 v2.19,30.69 | v1.76,12.31 1.76,11.38 C6.2 | v12.13,13.93 R6.2 | C3.1 14.92,9.96 v13.76,9.96 | R12.1 13.01,7.3 v13.31,7.3 | R5.2 22.03,7.22 v22.06,7.25 | C4.2 24.11,10.98 v23.77,10.98 | R2.2 24.3,10.45 v23.77,10.98 | BSTC.2 23,10.2 v23.77,10.98 | SD.1 8.72,12.46 7.45,11.19 6.93,11.19 | 6.93,11.19 SD.7 | v6.96,12.89 6.95,12.88 6.95,11.73 6.96,11.74 6.93,11.66 6.93,11.28 SD.9 6.93,10.59 6.93,11.19 | VR.2 4.31,24.89 v4.29,24.9 | C1.1 1.76,23.69 v1.7,23.64 | C2.1 14.15,23.68 v14.21,23.62
  pour Route2: -2.28,47.48 -2.28,-0.63 45.48,-0.63 45.48,47.67 44.59,47.67
  pour Route15: -2.34,47.42 -2.34,-0.57 45.48,-0.57 45.48,47.61
MAN
  Top 0.152: MAN.4 25.6,4.34 25.6,4.88 24.23,6.25 22.33,6.25 21.34,7.24 19.81,7.24 R9.1 19.74,7.32 19.66,7.39 19.66,13.49 23.01,16.84 23.01,28.19 22.33,28.88 21.79,28.88 MCU.8
N$1
  Top 0.152: CHR.A 19.74,2.9 19.74,5.11 R15.1
N$2
  Bottom 0.152: VR.5 8.08,24 8.08,24.54 L3.1
N$3
  Top 0.152: ON.A 15.77,2.97 15.77,3.5 14.25,5.03 R7.2
N$4
  Bottom 0.152: BATC.5 6.1,32.92 5.71,32.92 5.49,33.15 4.19,33.15 R10.2 4.12,33.15 2.29,33.15 R_THERM.1
N$5  (via drill 0.35)
  Top 0.152: v20.19,12.95 v20.95,12.19 20.95,10.82 v24.69,7.09
  Bottom 0.152: v20.95,12.19 21.95,11.2 22.63,11.2 BSTC.1 | v20.19,12.95 19.43,12.95 18.82,13.56 D2.2 | v24.69,7.09 26.36,7.09 28.96,4.5 L1.2
N$7
  Bottom 0.152: C5.1 16.38,12.95 16.99,12.95 18.36,11.58 18.59,11.58 19.2,10.97 19.2,10.74 20.12,9.83 21.87,9.83 22.4,9.3 22.63,9.3 BSTC.3 22.71,9.22 23.09,8.84 24.77,8.84 R2.1 24.84,8.84 25.98,9.98 26.59,9.98 R1.1 26.59,9.91 27.96,8.53 28.5,8.53 28.96,8.99 28.96,10.59 28.73,10.82 28.73,12.42 29.41,13.11 29.41,13.56 R3.1
N$8  (via drill 0.35)
  Top 0.152: v28.27,9.07 28.27,9.6 29.57,10.9 12V/24V_SWITCH.3
  Bottom 0.152: v28.27,9.07 28.27,9.98 R1.2
N$9  (via drill 0.35)
  Top 0.152: v29.87,15.01 29.87,15.7 29.64,15.93 12V/24V_SWITCH.1
  Bottom 0.152: v29.87,15.01 30.25,14.63 30.25,13.11 29.49,12.34 29.49,11.96 R3.2
N$10
  Bottom 0.152: BATC.4 6.1,32.46 5.71,32.46 5.49,32.69 4.95,32.69 4.19,31.93 4.19,31.55 R10.1
N$11
  Bottom 0.152: BATC.2 6.1,31.39 5.33,31.39 4.19,30.25 R11.2
N$18
  Top 0.152: SOL.A 23.62,2.97 23.62,5.11 R17.2
PG
  Bottom 0.152: BATC.7 8.15,32.46 8.15,32.84 BATC.6
RST
  Top 0.152: 19.13,5.94 24.08,5.94 24.92,5.11 24.92,2.13 25.07,1.98 26.21,1.98 26.75,2.52 26.75,7.09 25.68,8.15 RST.4 | 19.13,5.94 17.75,5.94 16.46,7.24 15.93,7.24 R8.1 | 19.13,5.94 19.13,13.41 19.89,14.17 19.89,26.36 21.18,27.66 21.72,27.66 MCU.9
S+
  Bottom 0.457: SD.6 4.19,9.91 3.81,9.91 3.05,9.14 3.05,8.15 4.12,7.09 6.25,7.09 8.23,5.11 SOLND.1
S-  (via drill 0.35)
  Top 0.457: v3.12,11.81 3.12,5.18 3.2,5.11 SOLND.2
  Bottom 0.457: v3.12,11.81 3.73,12.42 4.19,12.42 SD.8
S_OPEN  (via drill 0.35)
  Top 0.152: v29.34,14.4 29.03,14.4 28.73,14.1 28.73,11.51 27.74,10.52 27.74,3.05 26.36,1.68 23.62,1.68 23.01,2.29 23.01,3.05 22.02,4.04 22.02,5.11 R17.1 | v37.26,35.59 38.18,36.5 38.71,36.5 MCU.37
  Bottom 0.152: v29.34,14.4 29.34,18.75 37.26,26.67 v37.26,35.59
SD_IN1  (via drill 0.35)
  Top 0.152: v32.23,27.66 38.71,27.66 MCU.30 | v19.36,16.08 18.75,16.08 v13.45,10.78
  Bottom 0.152: SD.3 9.6,9.91 9.45,9.91 8.61,9.07 8.61,8.23 8.76,8.08 10.52,8.08 10.67,8.23 10.67,8.31 12.12,9.75 R12.2 12.19,9.83 12.5,9.83 v13.45,10.78 | v32.23,27.66 30.94,27.66 v19.36,16.08
SD_IN2  (via drill 0.35)
  Top 0.152: v12.19,14.71 12.19,29.34 16.99,34.14 16.99,34.9 20.65,38.56 26.36,38.56 35.97,28.96 38.71,28.96 MCU.31
  Bottom 0.152: 11.35,11.28 9.75,11.28 9.68,11.2 SD.2 | 11.35,11.28 12.12,11.28 R6.1 | v12.19,14.71 11.35,13.87 11.35,11.28
V_3.3  (via drill 0.35)
  Top 0.203: MAN.2 25.68,2.74 25.68,3.05 26.36,3.73 26.36,5.87 25.68,6.55 RST.2 25.6,6.71 25.6,6.93 21.49,11.05 21.49,12.65 20.73,13.41 20.73,14.02 23.39,16.69 23.39,35.51 22.4,36.5 21.79,36.5 MCU.2 21.72,36.5 20.11,36.5 19.13,35.52 19.13,35.51 v15.54,31.93 15.54,31.85 13.34,29.64 v13.34,26.98
  Bottom 0.203: VR.4 8,25.83 8,25.15 7.16,24.31 7.16,23.62 7.47,23.32 9.83,23.32 10.13,23.62 C2.2 | SD.4 9.68,8.69 9.91,8.69 11.35,10.13 11.35,10.36 11.58,10.59 12.72,10.59 12.88,10.74 12.88,16.99 9.83,20.04 9.83,23.24 C2.2 | 15.51,31.89 18.14,29.26 18.52,29.26 L3.2 | 15.51,31.89 13.72,33.68 13.41,33.68 R4.2 | v15.54,31.93 15.51,31.89 | v13.34,26.98 10.13,23.77 C2.2
V_BATT  (via drill 0.35)
  Top 0.203: R15.2 18.14,5.11 15.93,5.11 R7.1 15.93,5.18 15.24,5.87 15.24,7.92 | v18.59,12.12 18.59,11.28 16.88,9.56 | 15.24,7.92 16.88,9.56 | v16.84,9.6 16.88,9.56 | v5.56,37.64 5.56,40.31 BATT.1 | 15.24,7.92 15.01,7.92 v10.82,12.12
  Bottom 0.203: v18.59,12.12 19.51,11.2 19.89,11.2 BSTC.5 | L1.1 23.09,4.5 22.33,4.5 20.19,6.63 20.19,7.54 17.91,9.83 C3.2 17.83,9.83 17.6,9.6 v16.84,9.6 | v5.56,37.64 9.53,33.68 9.53,31.01 C8.2 9.91,30.94 8.15,30.94 BATC.10 8.08,30.86 8.08,30.48 7.09,29.49 7.09,27.51 5.49,25.91 VR.3 5.41,25.83 4.42,25.83 3.5,24.92 C1.2 3.35,24.84 3.58,24.84 4.42,24 5.41,24 VR.1 5.49,23.85 10.82,18.52 v10.82,12.12
V_BOOST  (via drill 0.35)
  Top 0.457: v21.26,13.64 22.48,13.64 23.66,14.82 | 23.66,14.82 25.76,16.92 30.33,16.92 30.56,16.69 30.56,14.4 29.64,13.49 12V/24V_SWITCH.2 | v23.55,14.94 23.66,14.82
  Bottom 0.457: 9.68,6.25 9.68,3.89 9.45,3.66 7.16,3.66 4.34,6.48 3.81,6.48 1.75,8.53 1.75,9.75 C6.1 | 9.68,6.25 7.39,8.53 4.34,8.53 4.27,8.61 SD.5 | v21.26,13.64 D2.1 | 18.67,15.01 23.16,15.01 23.39,14.78 | 18.67,15.01 16.84,15.01 14.86,13.03 C5.2 14.94,12.8 15.93,11.81 15.93,8.46 13.87,6.4 9.83,6.4 9.68,6.25 | 23.39,14.78 24.84,13.34 C4.1 | 18.67,15.01 18.67,19.43 16.92,21.18 16.92,28.5 11.58,33.83 11.58,44.81 C13.P | v23.55,14.94 23.39,14.78
V_SOLR  (via drill 0.35)
  Top 0.203: v6.1,30.25 6.1,30.71 5.56,31.24 SOLR.1
  Bottom 0.203: 6.17,30.25 6.17,29.18 6.33,29.03 C7.2 | 6.17,30.25 6.17,30.86 BATC.1 | v6.1,30.25 6.17,30.25

## Text on the board
tNames: Radgard R7 | 12v | - | + | 24v
200bmp: Radgard R4 | Radgard R4